# EAGLE board SOIC12-TSSOP12 (EAGLE 7.3.0)
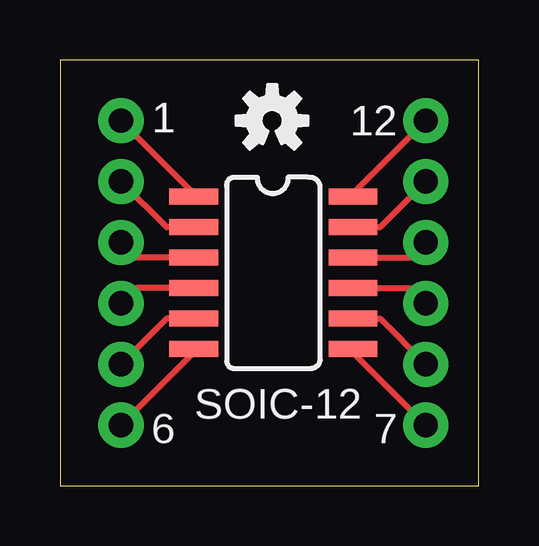
[diagram p0: board, top side]
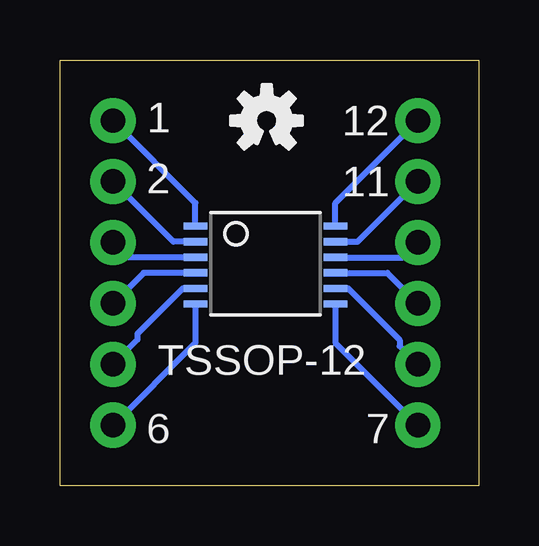
[diagram p1: board, bottom side, seen from below]

Size 17.45 x 17.77 mm. Coordinates in mm from the lower left corner, seen from the top.
Outline: 0,0 17.45,0 17.45,17.77 0,17.77 0,0
Copper layers (1*16): Top 0.0356mm / dielectric 1.5011mm / Bottom 0.0356mm
Design rules "OSH Park": minimum track width 6mil, minimum drill 13mil, track to track 6mil, track to pad 6mil, pad to pad 6mil, via to via 6mil, smd to smd 6mil, copper to edge 15mil, drill to drill 6mil, minimum pad ring 7mil, minimum via ring 7mil, stop-mask expansion 3mil, vias tented up to drill 0mil, thermal gap 10mil

## Footprints (pad centres in the part's own frame; a part is rotated, then mirrored left to right if it is on the bottom)
1X06_NO_SILK = drill 1.016 pad 1.88: 1 0,0; 2 2.54,0; 3 5.08,0; 4 7.62,0; 5 10.16,0; 6 12.7,0
SOIC-12 = smd 0.66 x 2.032: 1 -3.175,-3.315; 2 -1.905,-3.315; 3 -0.635,-3.315; 4 0.635,-3.315; 5 1.905,-3.315; 6 3.175,-3.315; 7 3.175,3.315; 8 1.905,3.315; 9 0.635,3.315; 10 -0.635,3.315; 11 -1.905,3.315; 12 -3.175,3.315
TSSOP12 = smd 0.305 x 0.991: 1 -1.95,-2.918; 2 -1.3,-2.918; 3 -0.65,-2.918; 4 0,-2.918; 5 0.65,-2.918; 6 1.3,-2.918; 7 1.3,2.918; 8 0.65,2.918; 9 0,2.918; 10 -0.65,2.918; 11 -1.3,2.918; 12 -1.95,2.918

## Placement (x,y rotation side)
FRAME1  FRAME-LETTER  [CREATIVE_COMMONS]  -10.92,-12.9 0 top  (outside the outline)
JP1  [1X06_NO_SILK]  2.54,2.54 90 top
JP2  [1X06_NO_SILK]  15.24,2.54 90 top
U$1  SOIC-12  [SOIC-12]  8.89,8.89 270 top
U$2  TSSOP-12  [TSSOP12]  8.89,8.89 270 bottom
U$3  [OSHW-LOGO-S]  8.84,15.24 0 top
U$4  [OSHW-LOGO-S]  8.84,15.24 0 bottom

## Library data of the parts
FRAME1 U$3 U$4 = SparkFun-Aesthetics
JP1 JP2 = SparkFun-Connectors
U$1 U$2 = Kevin-GenericICFootprints

## Nets
N$1: JP1.6 U$1.1 U$2.12
N$2: JP1.5 U$1.2 U$2.11
N$3: JP1.4 U$1.3 U$2.10
N$4: JP1.3 U$1.4 U$2.9
N$5: JP1.2 U$1.5 U$2.8
N$6: JP1.1 U$1.6 U$2.7
N$11: JP2.6 U$1.12 U$2.1
N$12: JP2.5 U$1.11 U$2.2
N$13: JP2.4 U$1.10 U$2.3
N$14: JP2.3 U$1.9 U$2.4
N$15: JP2.2 U$1.8 U$2.5
N$16: JP2.1 U$1.7 U$2.6

## Tracks (layer width: path | path; a pad name or v marks a point on that pad's centre or on a via)
N$1
  Top 0.254: U$1.1 5.57,12.2 JP1.6
  Bottom 0.254: U$2.12 5.97,11.81 JP1.6
N$2
  Top 0.254: U$1.2 4.45,10.79 JP1.5
  Bottom 0.254: U$2.11 5.05,10.19 JP1.5
N$3
  Top 0.254: U$1.3 3.18,9.52 JP1.4
  Bottom 0.254: U$2.10 3.16,9.54 JP1.4
N$4
  Top 0.254: U$1.4 3.18,8.25 JP1.3
  Bottom 0.254: U$2.9 3.81,8.89 JP1.3
N$5
  Top 0.254: U$1.5 4.45,6.98 JP1.2
  Bottom 0.254: U$2.8 5.45,8.24 3.3,6.1 3.3,5.84 JP1.2
N$6
  Top 0.254: U$1.6 5.57,5.57 JP1.1
  Bottom 0.254: U$2.7 5.97,5.97 JP1.1
N$11
  Top 0.254: U$1.12 12.21,12.2 JP2.6
  Bottom 0.254: U$2.1 11.81,11.81 JP2.6
N$12
  Top 0.254: U$1.11 13.34,10.79 JP2.5
  Bottom 0.254: U$2.2 12.73,10.19 JP2.5
N$13
  Top 0.254: U$1.10 14.61,9.52 JP2.4
  Bottom 0.254: U$2.3 14.62,9.54 JP2.4
N$14
  Top 0.254: U$1.9 14.61,8.25 JP2.3
  Bottom 0.254: U$2.4 13.97,8.89 JP2.3
N$15
  Top 0.254: U$1.8 13.34,6.98 JP2.2
  Bottom 0.254: U$2.5 12.33,8.24 14.22,6.35 14.22,6.1 JP2.2
N$16
  Top 0.254: U$1.7 12.21,5.57 JP2.1
  Bottom 0.254: U$2.6 11.81,5.97 JP2.1

## Text on the board
tPlace: 1 | 12 | SOIC-12 | 6 | 7
bPlace: 12 | 1 | 11 | 2 | TSSOP-12 | 7 | 6
tDocu: Kevin Neubauer